# Altium PCB STM8_FootPrint.pcbdoc
Units mil, origin at the board's own origin, x right, y up, seen from the top; angles counter-clockwise.
Board outline 1341.67 x 2102 mil, 2 copper layers (Top Layer, Bottom Layer); 25 components, 23 nets, 97 pads, 2 vias.
Unrouted connection lines stored in the file: 1.
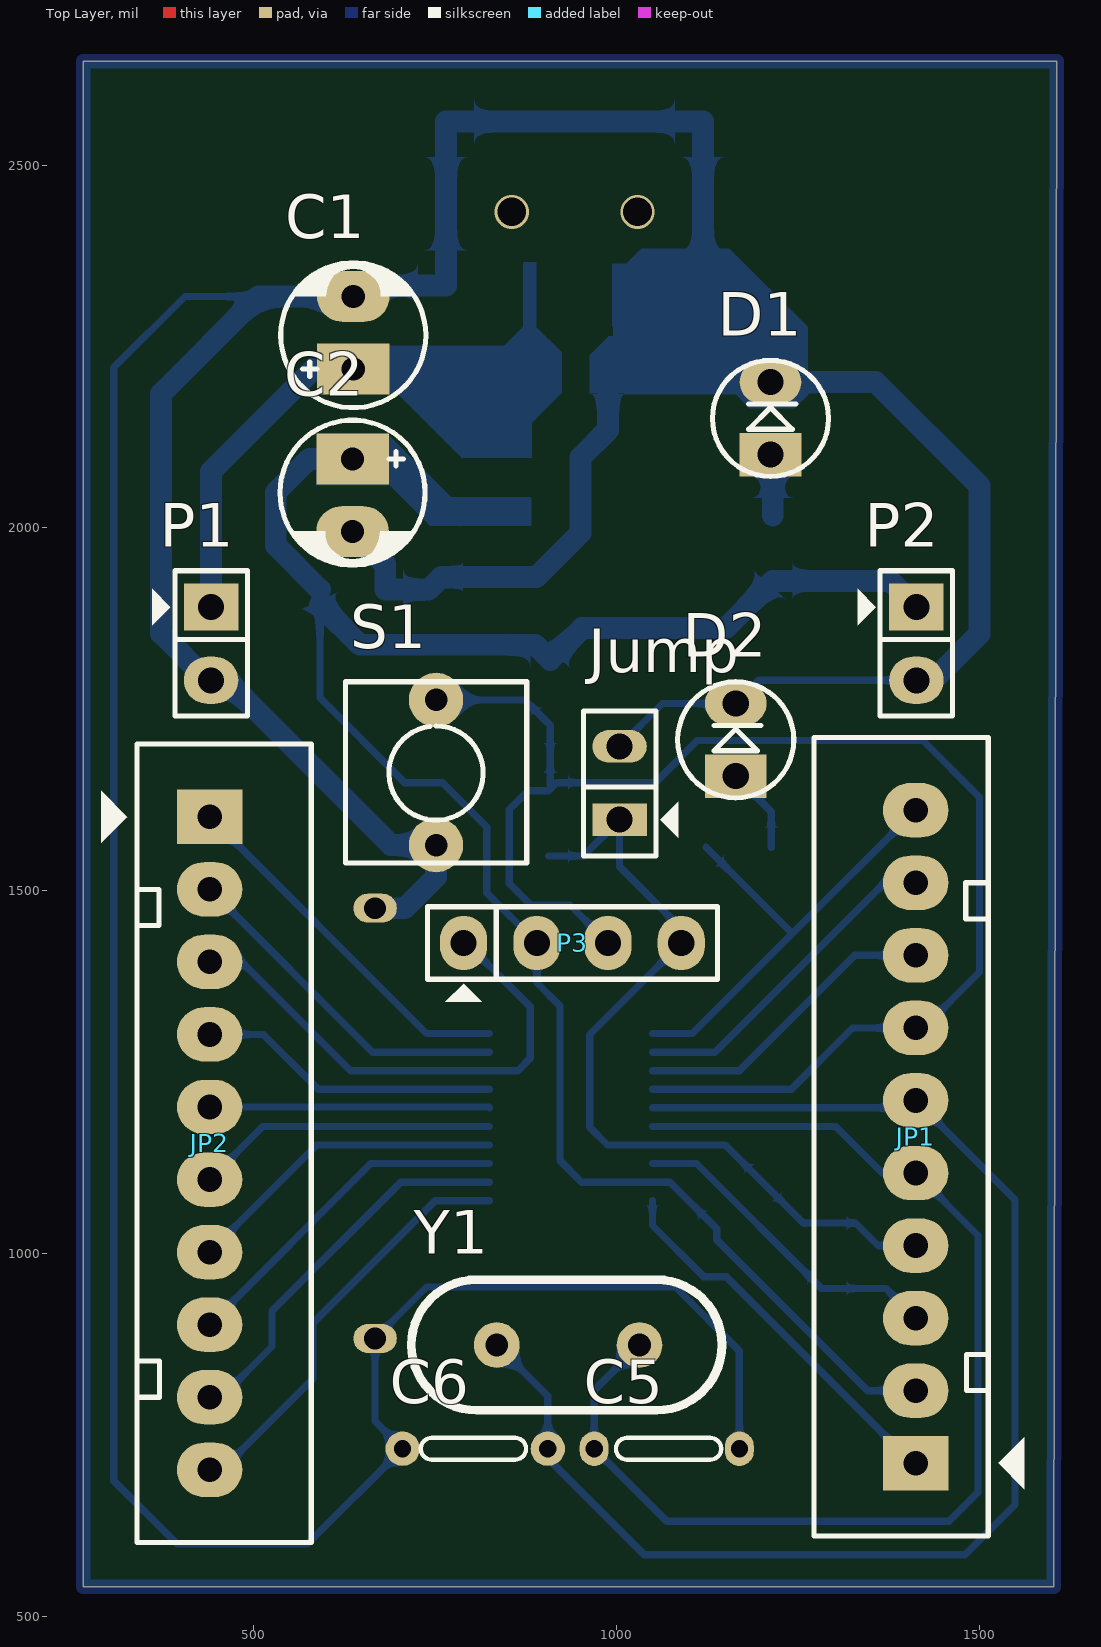
[diagram p0: Top Layer view]
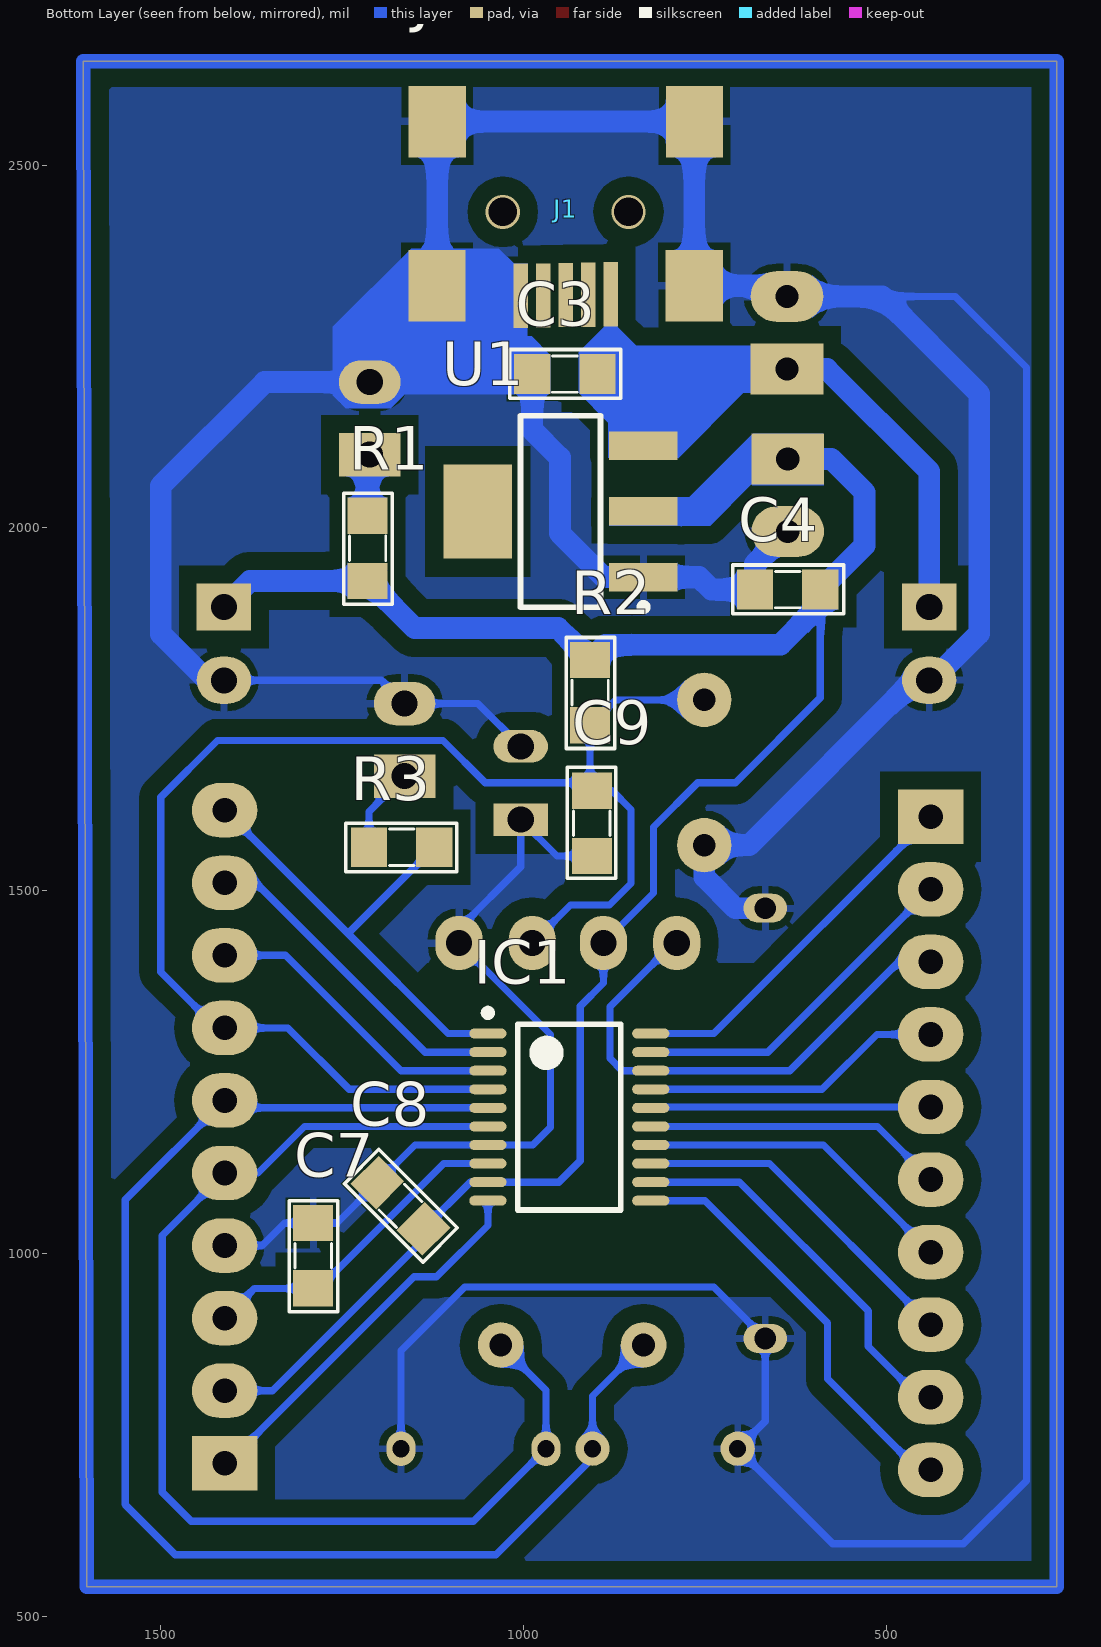
[diagram p1: Bottom Layer view, seen from below]
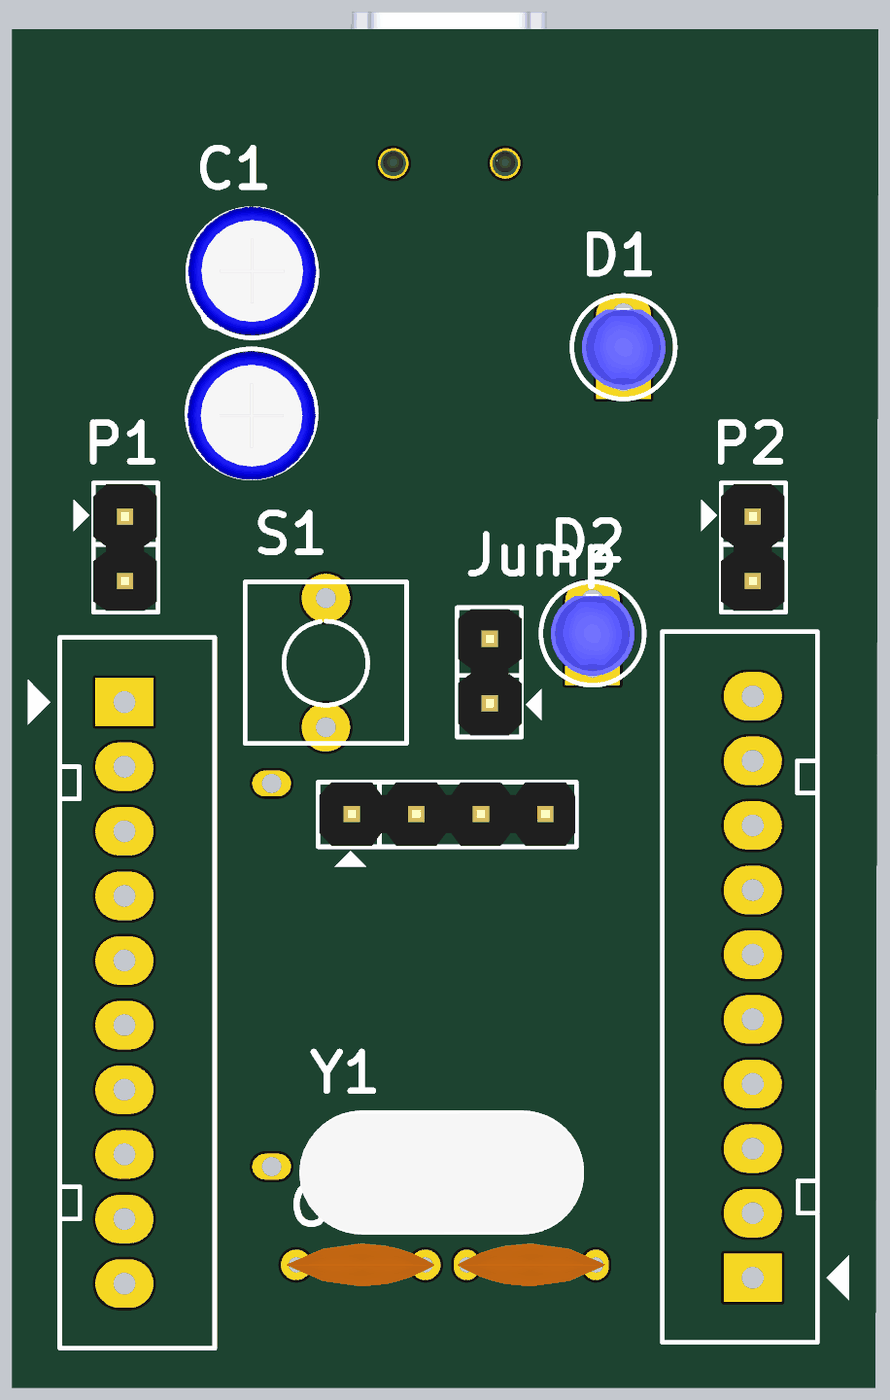
[diagram p2: 3D render of the assembled board from above, using the file's embedded part models]
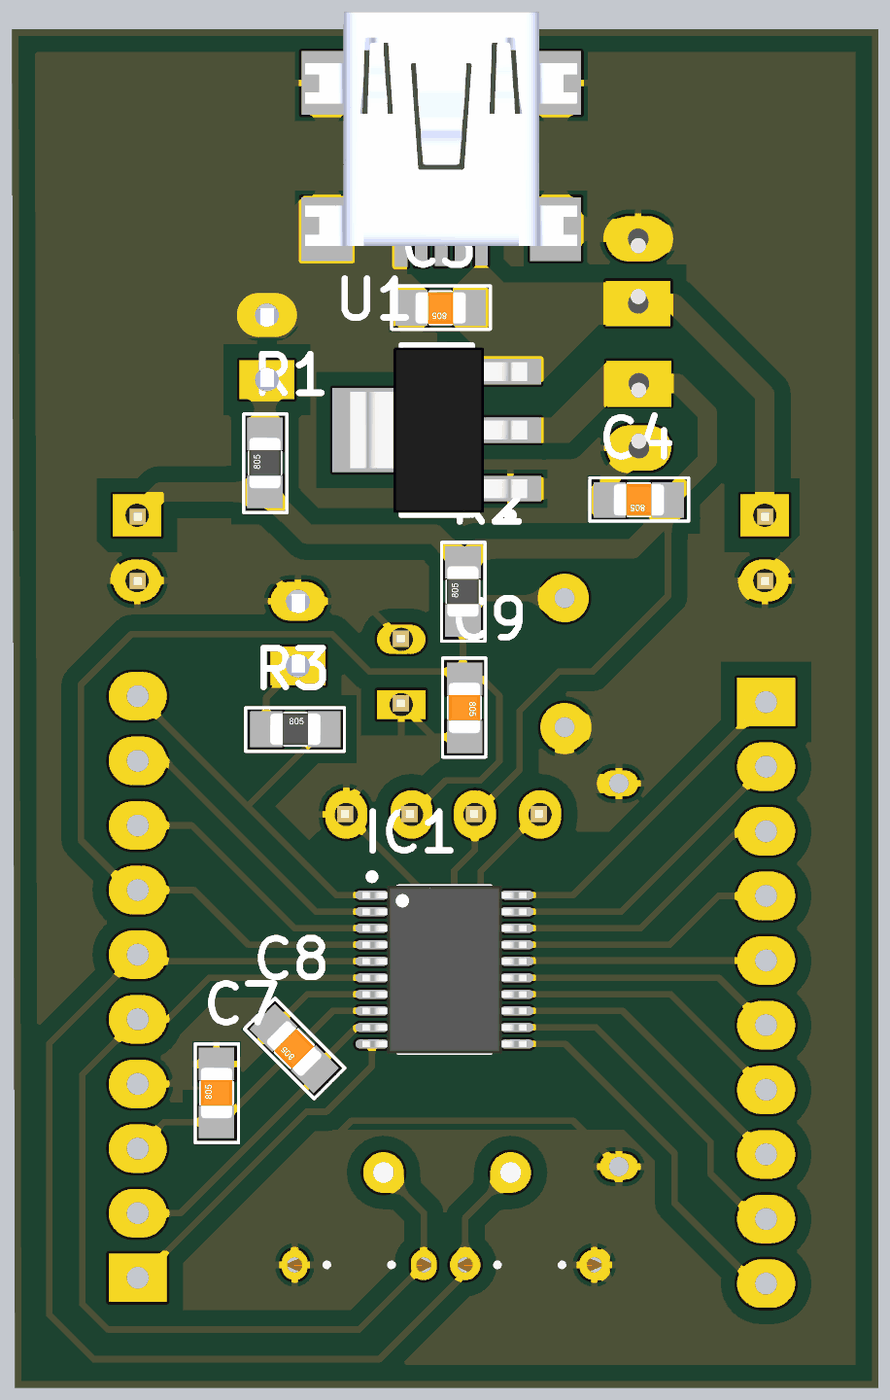
[diagram p3: 3D render of the assembled board from below, using the file's embedded part models]

## Layer stack, top to bottom
Top Solder: solder mask 0.4, Solder Resist, Dk 3.5
Top Layer: signal copper 1.4
Dielectric 1: dielectric 12.6, FR-4, Dk 4.8
Bottom Layer: signal copper 1.4
Bottom Solder: solder mask 0.4, Solder Resist, Dk 3.5

## Board outline
265,541 1602.1,541 1606.67,2643 265,2643

## Design rules (kind name [scope] priority, off if disabled: settings)
Clearance [All] p1: gap=25 ignorepadtopadclearanceinfootprint=FALSE
PolygonConnect [All] p1: connectstyle=Relief reliefconductorwidth=10 reliefentries=4 polygonreliefangle="90 Angle" airgapwidth=10
RoutingLayers [All] p1: top layer_v5=FALSE bottom layer_v5=TRUE
RoutingVias [All] p1: holewidth=30 width=80 viastyle="Through Hole" minholewidth=30 minwidth=80 maxholewidth=30 maxwidth=80
SolderMaskExpansion [All] p1: expansion=4
Width [All] p1: maxlimit=30 minlimit=10 preferedwidth=30
29 further rules are at their usual default settings.

## Components (designator, comment, footprint, x,y, rotation, side; value= is the part's Value field where it differs from the comment)
C1 "Cap Pol" CP1/2 637,2219 r90 top
C2 "Cap Pol" CP1/2 636,2095.16 r270 top
C3 "Cap Non-Pol SMD" CAP-SM-0805 898,2212 r0 bottom
C4 "Cap Non-Pol SMD" CAP-SM-0805 591,1915 r0 bottom
C5 "Capacitor Ceramic" Tu-ceramic#1 1169,731 r180 top
C6 "Capacitor Ceramic" Tu-ceramic#2 705,731 r0 top
C7 "Cap Non-Pol SMD" CAP-SM-0805 1289.99,952 r90 bottom
C8 "Cap Non-Pol SMD" CAP-SM-0805 1137.92,1034.06 r45 bottom
C9 "Cap Non-Pol SMD" CAP-SM-0805 906,1638 r270 bottom
D1 "LED" "LED 3mm" 1212,2101 r90 top
D2 "LED" "LED 3mm" 1164,1658 r90 top
IC1 "STM8S003F3P6" TSSOP20 937,1188 r180 bottom
J1 "USB-5" USB-M2 945,2457 r180 bottom
JP1 "JP10" Header10 1412,711 r90 top
JP2 "JP10" Header10 439,1602 r270 top
Jump "Header 2" JP2#1 1004,1598 r90 top
P1 "Header 2" JP2#2 441,1891 r270 top
P2 "Header 2" JP2#2 1413,1891 r270 top
P3 "Header 4" JP4 889,1428 r0 top
R1 "RESISTOR SMD" RES-SM-0805 1215,1927 r90 bottom
R2 "RESISTOR SMD" RES-SM-0805 908.39,1728.06 r90 bottom
R3 "RESISTOR SMD" RES-SM-0805 1213,1560 r180 bottom
S1 "Tact SW - 2Pin" SW2 751,1563 r90 top
U1 "LM1117-3.3V" SOT223 949,2022.79 r90 bottom
Y1 "12MHz" XTAL 931,874 r180 top

## Footprints (in the part's own frame and the unit in brackets; to place one, negate y for a bottom-side part, rotate by r counter-clockwise, add the part's x,y. Pads: shape width x height; smd on the part's side, far side on the other; paste and mask are expansions set on the pad)
CAP-SM-0805 [mil]
  rect 50x55 smd: 1(0,0) 2(90,0)
  silkscreen extent -32,-34 121,33, body extent 6,-25 84,25, height 31
CP1/2 [mil] "Tu hoa < 22uF/16>50V"
  rect 70x100 hole 32: 1(0,0)
  oval 70x100 hole 32: 2(100,0)
  silkscreen extent -53,-100 146,100, body extent -49,-99 149,99, height 287
Header10 [mil] "CON10"
  rect 75x90 hole 34: 1(0,0)
  oval 75x90 hole 34: 2(100,0) 3(200,0) 4(300,0) 5(400,0) 6(500,0) 7(600,0) 8(700,0) 9(800,0) 10(900,0)
  silkscreen extent -100,-150 1000,140
JP2#1 [mil]
  rect 45x75 hole 36: 1(0,0)
  oval 45x75 hole 36: 2(101,0)
  silkscreen extent -50,-81 150,50, body extent -48,-50 148,48, height 323
JP2#2 [mil]
  rect 65x75 hole 36: 1(0,0)
  oval 65x75 hole 36: 2(101,0)
  silkscreen extent -50,-81 150,50, body extent -48,-50 148,48, height 323
JP4 [mil] "Jumper 4"
  oval 65x75 hole 36: 1(-100,0) 2(1,0) 3(99,0) 4(200,0)
  silkscreen extent -150,-81 250,50, body extent -148,-48 248,50, height 323
"LED 3mm" [mil]
  rect 60x85 hole 36: 1(0,0)
  oval 60x85 hole 36: 2(100,0)
  silkscreen extent -30,-80 130,80, body extent -16,-65 111,65, height 182
RES-SM-0805 [mil]
  rect 50x55 smd: 1(0,0) 2(90,0)
  silkscreen extent -32,-34 121,33, body extent 6,-25 84,25, height 31
SOT223 [mm]
  rect 1x2.4 smd: 1(-2.3,-2.9) 2(0,-2.9) 3(2.3,-2.9)
  rect 3.3x2.4 smd: 4(0,2.9)
  silkscreen extent -3.47,-3.02 3.35,1.4, body extent -3.25,-3.56 3.25,3.4, height 1.68
SW2 [mil] "SW button 2pin, 250x 250 mil"
  round 75 hole 31: 1(0,0) 2(200,0)
  silkscreen extent -25,-125 225,125
TSSOP20 [mm] "TSSOP, 20-Leads, Body 6.50x4.40mm, Pitch 0.65mm, IPC High Density"
  oval 1.3x0.35 smd: 1(-2.85,2.925) 2(-2.85,2.275) 3(-2.85,1.625) 4(-2.85,0.975) 5(-2.85,0.325) 6(-2.85,-0.325) 7(-2.85,-0.975) 8(-2.85,-1.625) 9(-2.85,-2.275) 10(-2.85,-2.925) 11(2.85,-2.925) 12(2.85,-2.275) 13(2.85,-1.625) 14(2.85,-0.975) 15(2.85,-0.325) 16(2.85,0.325) 17(2.85,0.975) 18(2.85,1.625) 19(2.85,2.275) 20(2.85,2.925)
  silkscreen extent -2.98,-3.25 1.8,3.77, body extent -3.23,-3.3 3.23,3.3, height 1.25
Tu-ceramic#1 [mm] "Tu gom mini"
  oval 1.016x1.2 hole 0.6: 1(0,0) 2(5.08,0)
  silkscreen extent 0.64,-0.38 4.32,0.38, body extent -0.38,-0.85 5.46,0.85, height 6.12
Tu-ceramic#2 [mm] "Tu gom mini"
  round 1.2 hole 0.6: 1(0,0) 2(5.08,0)
  silkscreen extent 0.64,-0.38 4.32,0.38, body extent -0.38,-0.85 5.46,0.85, height 6.12
USB-M2 [mm]
  rect 0.5x2.25 smd: 1(1.651,-3.429) 2(0.864,-3.442) 3(0.076,-3.454) 4(-0.711,-3.467) 5(-1.499,-3.48)
  rect 2x2.5 smd: 5(-4.424,-3.124) 5(-4.42,2.616) 5(4.576,-3.124) 5(4.58,2.616)
  body extent -5.27,-3.8 5.43,5.4, height 3.95
XTAL [mm]
  round 1.6 hole 0.8: 1(-2.552,0.001) 2(2.448,0.001)
  silkscreen extent -5.44,-2.29 5.44,2.29, body extent -5.55,-2.32 5.62,2.35, height 3.63

## Part data
C1 C2: "Polarized Capacitor (Radial)"
C3 C4 C7 C8 C9: "Capacitor"
C5 C6: library part CapDecop, "Capacitor"
IC1: "MCU 8BIT  8KB FLASH TSSOP-20"
JP1 JP2: library part Header10, "Connector 10"
Jump P1 P2: "Header, 2-Pin"
P3: "Header, 4-Pin"
R1 R2 R3: "Resistor"
S1: "Switch button 2 pin"
U1: library part LM1117, "800mA Low-Dropout Linear Regulator"
Y1: library part XTAL, "Crystal Oscillator"

## Free pads (board coordinates)
  oval 60x40 hole 30: 3(667,883) 4(667,1476)

## Via types
v1: diameter 47.24, hole 39.37, Top Layer to Bottom Layer, 2 vias

## Nets (pads, with @x,y where several pads share a name; then routed paths per layer and width w, separated by ;. In a path a pad name is that pad's centre, name@x,y a point inside that pad or via, vN(x,y) a via of type N, cw(c..) or ccw(c..) an arc to the next point about the centre after c; other vN are vias at no path point)
+3V3: C2.1 C4.1 C8.1 IC1.9 JP1.2 P2.1 P3.2 R1.1 R2.2 U1.2 | length 2782.5
  Bottom Layer w10: C4.1 591,1894 591,1766 708,1649 760,1649 821,1588 821,1497 P3.2 890,1373 922,1341 922,1128 951.57,1098.43 IC1.9 1073.54,1098.43 C8.1 1137.92,1019.08 1346,811 JP1.2
  Bottom Layer w30: C4.1@591,1894 646,1839 887.45,1839 R2.2 952.33,1862 1150,1862 R1.1 1377,1927 P2.1 ; C4.1 530,1976 530,2049 576.16,2095.16 C2.1
+5V: C1.1 C3.1 J1.1 P1.1 U1.3 | length 441.4
  Bottom Layer w30: P1.1 441,2078 582,2219 C1.1
GND: C1.2 C2.2 C3.2 C4.2 C5.1 C6.1 C7.2 C8.2 C9.2 D1.2 D2.2 IC1.7 J1.5 JP1.4 P1.2 P2.2 P3.4 pad.3 pad.4 S1.1 U1.1 | length 8455.1
  Bottom Layer w10: 506,2319 405,2319 307,2221 307,687 394,600 574,600 C6.1 667,769 pad.3 738,954 1081,954 1169,866 C5.1 ; C9.2 954,1548 1004,1598 1004,1533 1089,1448 P3.4 963,1302 963,1174 987.39,1149.61 IC1.7 1149.64,1149.61 C8.2 1257.26,1042 C7.2 1329,1042 1360,1011 JP1.4 ; 1004,1699 1063,1758 D2.2 1196,1790 P2.2
  Bottom Layer w30: C2.2 681,1950.16 C4.2 741,1915 758.24,1932.24 U1.1 889.24,1932.24 950,1993 950,2097 988,2135 C3.2 ; pad.4 708,1476 751,1519 S1.1 ; S1.1@766,1548 S1.1 ; P2.2 1436,1790 1500,1854 1500,2058 1357,2201 D1.2 1212,2241.17 1119.17,2334 1119,2334.17 1119,2560 764.67,2560 764.83,2559.83 764.83,2334 652,2334 C1.2 506,2319 372,2185 372,1854.64 436.64,1790 P1.2 462,1790 689,1563 S1.1
NetC7_1: C7.1 IC1.8 JP1.3 | length 451
  Bottom Layer w10: IC1.8 1109.98,1124.02 1282,952 C7.1 1371,952 JP1.3
NetD1_1: D1.1 R1.2 | length 85.2
  Bottom Layer w30: D1.1 1215,2098 R1.2
NetD2_1: D2.1 R3.1 | length 118.3
  Bottom Layer w10: D2.1 1213,1609 R3.1
NetIC1_2: IC1.2 JP1.9 | length 459.5
  Bottom Layer w10: IC1.2 1135.57,1277.57 1369,1511 JP1.9
NetIC1_3: IC1.3 JP1.8 | length 428.7
  Bottom Layer w10: IC1.3 1168.98,1251.98 1328,1411 JP1.8
NetIC1_10: IC1.10 JP1.1 | length 532.6
  Bottom Layer w10: IC1.10 1049.2,1038.8 1120,968 1151,968 1408,711 JP1.1
NetIC1_11: IC1.11 JP2.10 | length 584.5
  Bottom Layer w10: JP2.10 456,702 581,827 581,904 749.84,1072.84 IC1.11
NetIC1_12: IC1.12 JP2.9 | length 546.3
  Bottom Layer w10: JP2.9@439,811 JP2.9 455,802 525,872 525,921 702.43,1098.43 IC1.12
NetIC1_13: IC1.13 JP2.8 | length 477.8
  Bottom Layer w10: JP2.8 661.02,1124.02 IC1.13
NetIC1_14: IC1.14 JP2.7 | length 446.9
  Bottom Layer w10: JP2.7 586.61,1149.61 IC1.14
NetIC1_15: IC1.15 JP2.6 | length 416.1
  Bottom Layer w10: JP2.6 512.2,1175.2 IC1.15
NetIC1_16: IC1.16 JP2.5 | length 386.3
  Bottom Layer w10: JP2.5 823.59,1202 IC1.16
NetIC1_17: IC1.17 JP2.4 | length 417.1
  Bottom Layer w10: JP2.4 513,1302 588.61,1226.39 IC1.17
NetIC1_19: IC1.19 JP2.2 | length 478.8
  Bottom Layer w10: JP2.2 663.43,1277.57 IC1.19
NetIC1_20: IC1.20 JP2.1 | length 509.6
  Bottom Layer w10: JP2.1 737.84,1303.16 IC1.20
NRST: C9.1 IC1.4 JP1.7 P3.3 R2.1 S1.2 | length 2009.9
  Bottom Layer w10: S1.2 873.45,1763 R2.1 C9.1@908.39,1640.39 ; P3.3 935.5,1480.5 881.5,1480.5 852,1510 852,1612 878,1638 C9.1 C9.1@908.39,1640.39 ; IC1.4 1240.39,1226.39 1325,1311 JP1.7 1423,1311 1500,1388 1500,1629 1422,1707 1111,1707 1053,1649 917,1649 C9.1@908.39,1640.39
OSCIN: C6.2 IC1.5 JP1.6 Y1.2 | length 1899.5
  Bottom Layer w10: Y1.2 905,803.58 C6.2 905,718 1038,585 1480,585 1549,654 1549,1074 JP1.6 1412,1200.8 IC1.5
OSCOUT: C5.2 IC1.6 JP1.5 Y1.1 | length 1620.8
  Bottom Layer w10: Y1.1 969,811.51 C5.2 1069,631 1458,631 1498,671 1498,1025 JP1.5 1366,1111 1301.8,1175.2 IC1.6
PD4: IC1.1 JP1.10 R3.2 | length 659.2
  Bottom Layer w10: IC1.1 1104.16,1303.16 1241,1440 ; R3.2 1241,1442 1241,1440 ; JP1.10 1241,1440
SWIM: IC1.18 JP2.3 P3.1 | length 735.6
  Bottom Layer w10: JP2.3 483,1402 633.02,1251.98 IC1.18 863.98,1251.98 881,1269 881,1340 793,1428 P3.1 P3.1@789,1403
pads on no net: J1.2 J1.3 J1.4 Jump.1 Jump.2 U1.4
copper on no net: | length 6882.8
  Bottom Layer w20: 265,541 265,2643 1606.67,2643 1602.1,541 265,541
  other v1: 855.39,2435.57 1028.61,2435.57

## Polygon pours and split planes (outlines as drawn)
GND on Bottom Layer (solid, remove dead copper, pour order 0): 265,2643 1606.67,2643 1606.67,545.57 1602.1,541 265,541

## Other copper
Bottom Layer:
  region net GND: 994,2364 994,2278 995,2277 995,2264 989,2264 963,2238 963,2186 1010,2186 1012,2184 1164,2184 1183,2165 1245,2165 1263,2183 1263,2277 1155,2385 1034,2385 1013,2364
  region net +3V3: 587,2130 684,2130 772,2042 881,2042 882,2041 882,2003 784,2003 783,2002 782,2003 743,2003 686,2060 685,2059 586,2059
  region net +5V: 871,2366 871,2277 845,2251 588,2251 588,2186 697,2186 787,2096 788,2097 883,2097 883,2145 925,2187 924,2188 924,2242 888,2278 889,2279 889,2366